# Altium PCB PDB_Rev1.PcbDoc (part 1 of 2)
Units mil, origin at the board's own origin, x right, y up, seen from the top; angles counter-clockwise.
Board outline 7157 x 4373 mil, 4 copper layers (Top Layer, Int1 (GND), Int2 (PWR), Bottom Layer), stack 53.912 mil thick; 59 components, 21 nets, 135 pads, 0 vias.
Unrouted connection lines stored in the file: 51.
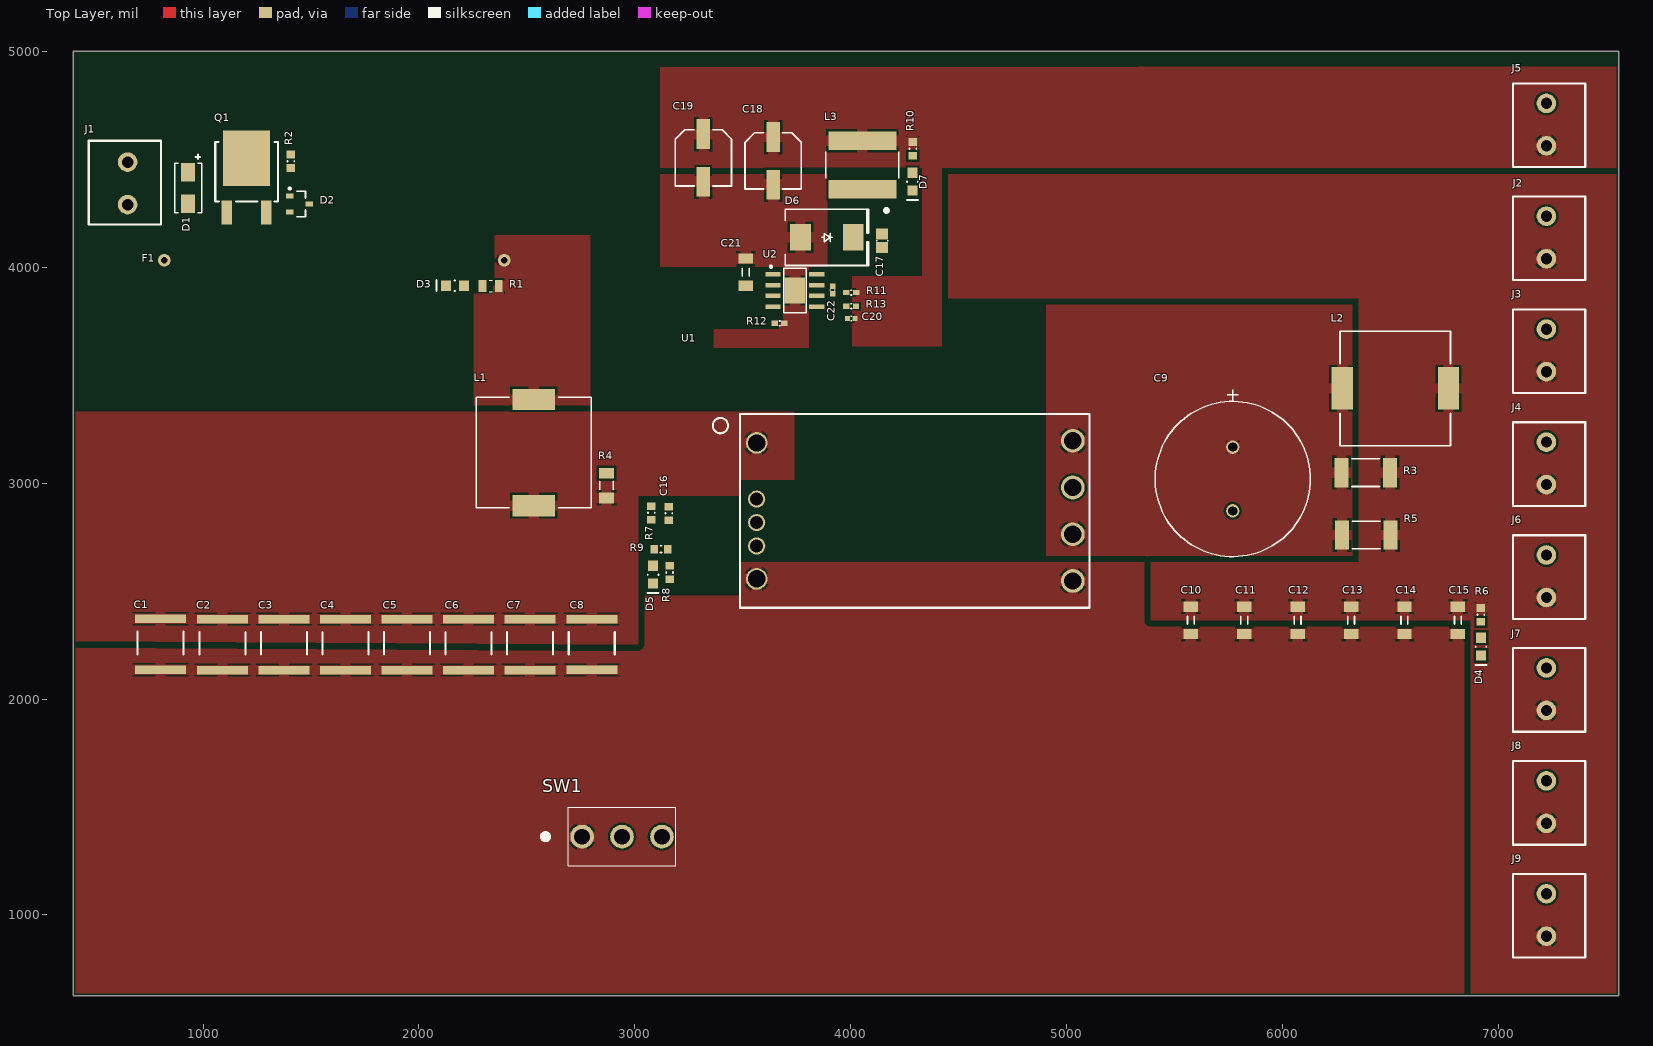
[diagram p0: Top Layer view]
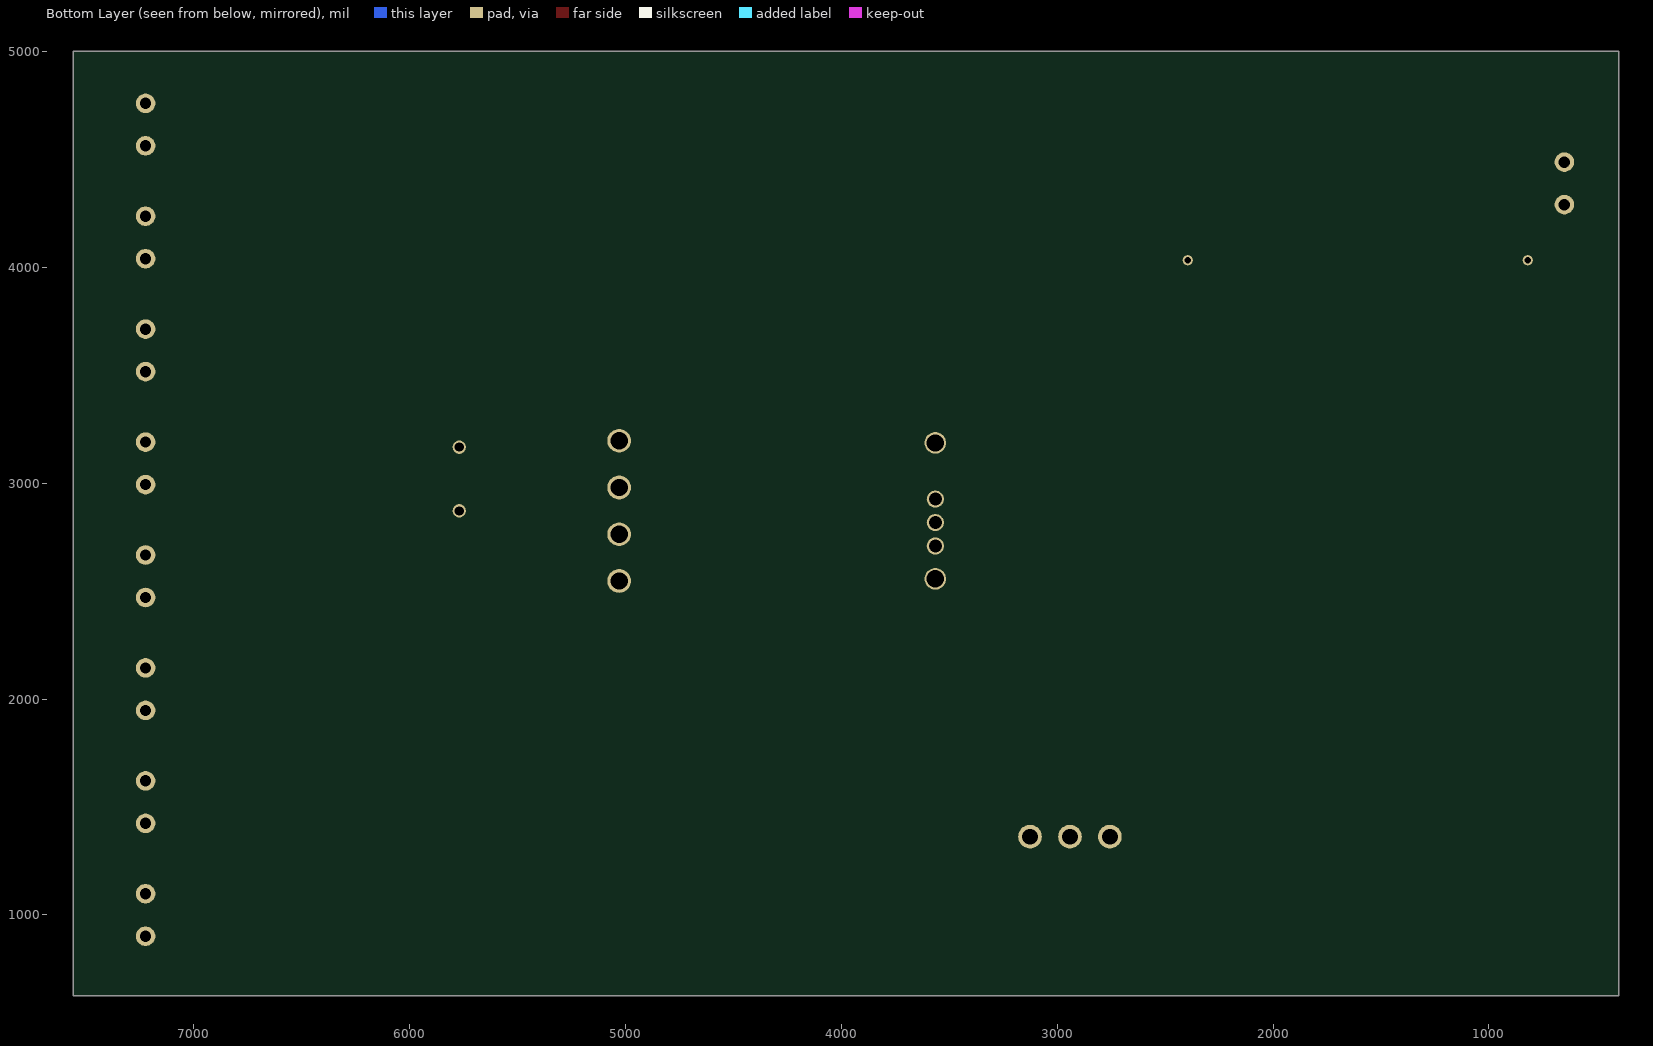
[diagram p1: Bottom Layer view, seen from below]
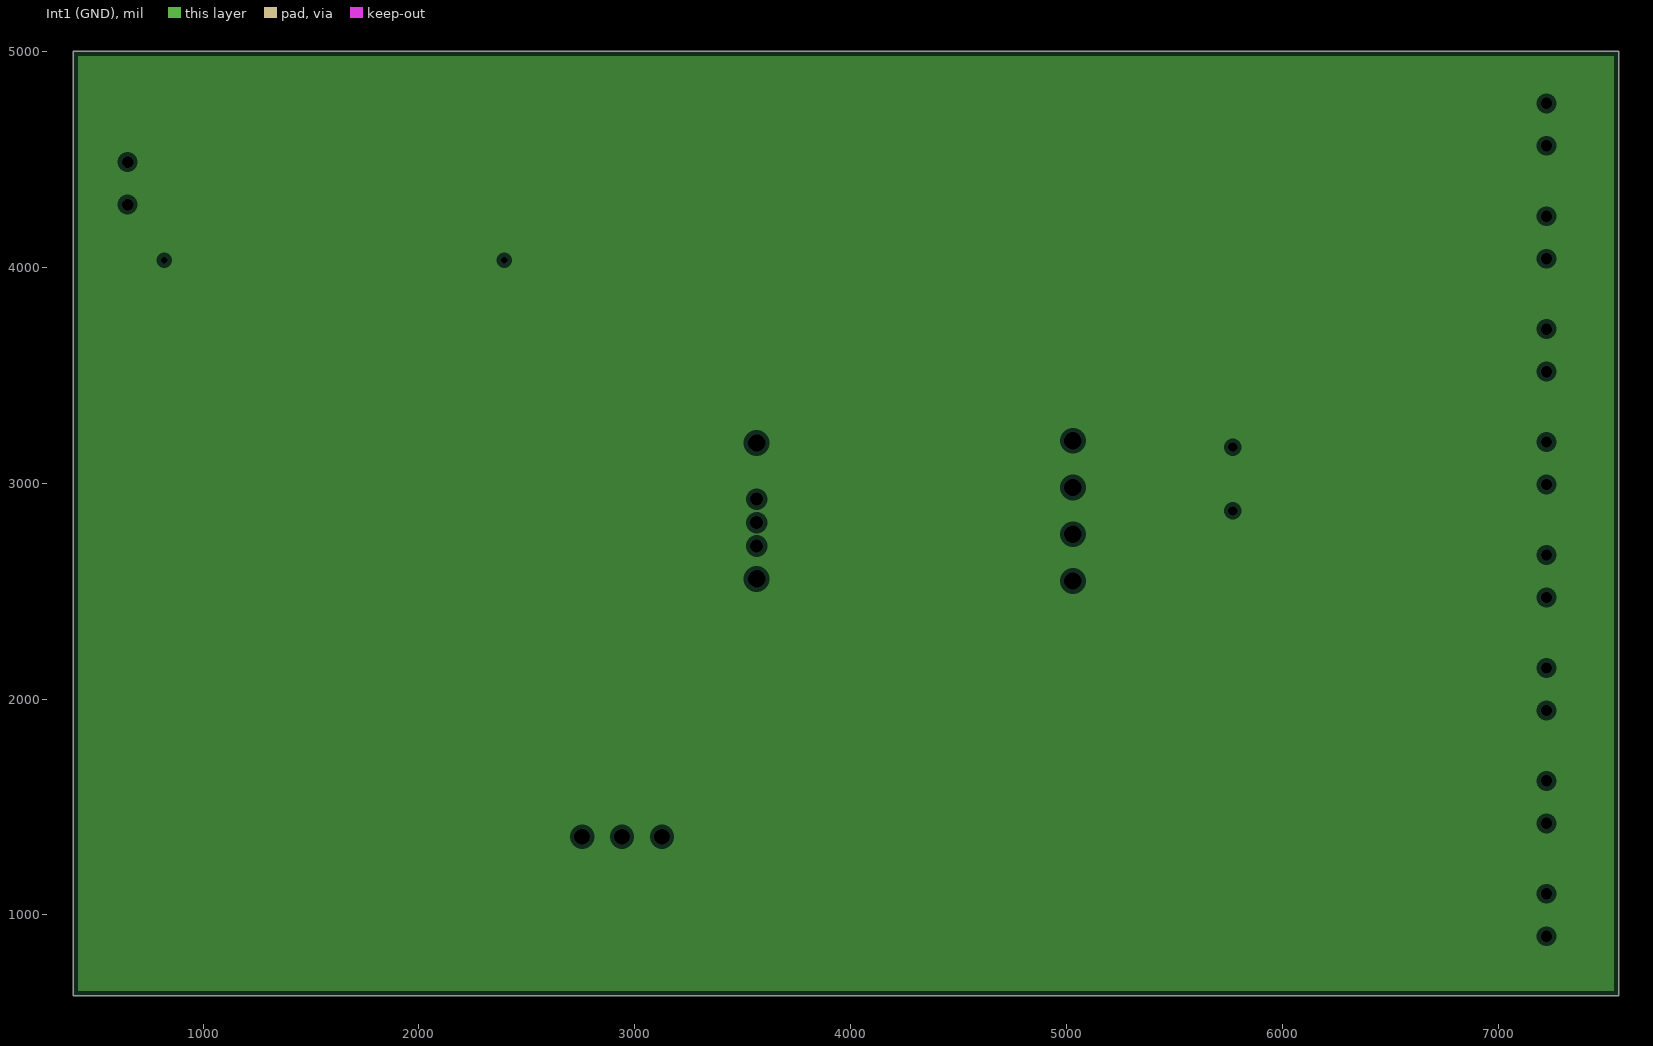
[diagram p2: Int1 (GND), clearances drawn from the general rule]
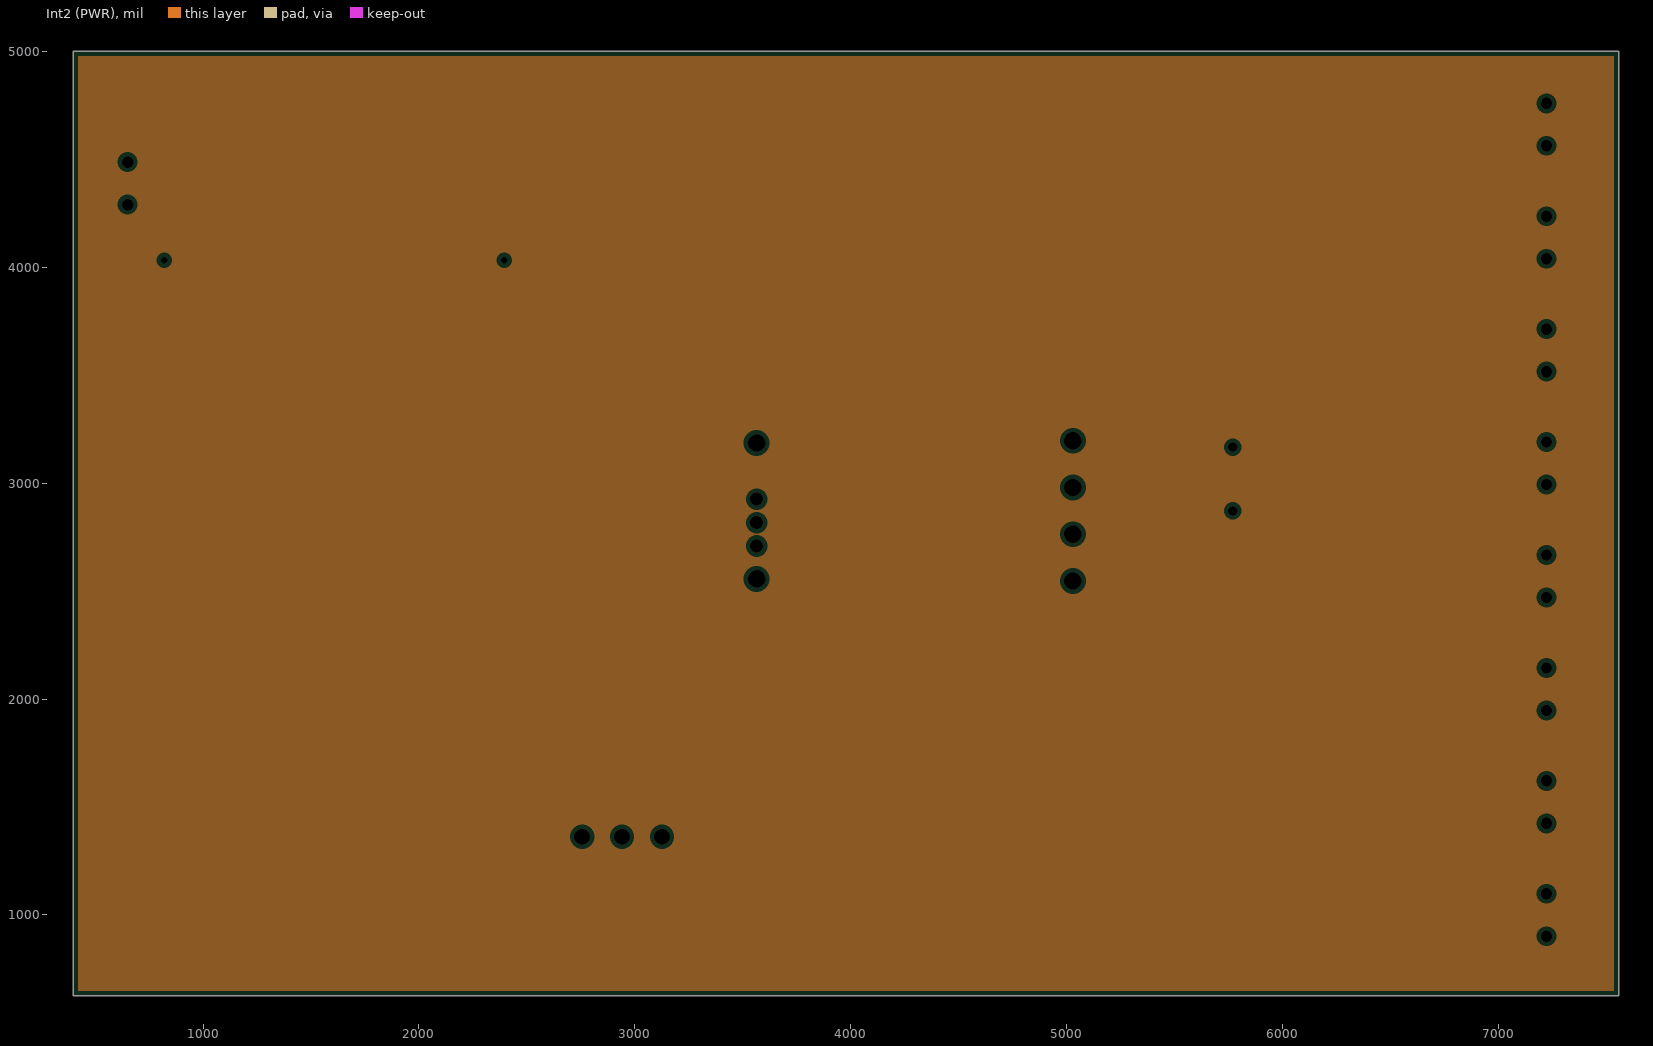
[diagram p3: Int2 (PWR), clearances drawn from the general rule]

## Layer stack, top to bottom
Top Solder: solder mask 1, SM-001, Dk 4
Top Layer: signal copper 1.378
Dielectric 1: prepreg 5.1, PP-017, Dk 4.3
Dielectric 2: prepreg 5.1, PP-017, Dk 4.3
Int1 (GND): plane copper 1.378
Dielectric 3: core 28, Core-039, Dk 4.8
Int2 (PWR): plane copper 1.378
Dielectric 4: prepreg 5.1, PP-017, Dk 4.3
Dielectric 5: prepreg 5.1, PP-017, Dk 4.3
Bottom Layer: signal copper 1.378
Bottom Solder: solder mask 1, SM-001, Dk 4

## Board outline
400,627 7557,627 7557,5000 400,5000

## Design rules (kind name [scope] priority, off if disabled: settings)
BoardOutlineClearance [All] p1: gap=10 ignorepadtopadclearanceinfootprint=FALSE except(0: Arc-SplitContinuation Track-SplitContinuation SMDPad-SplitContinuation THPad-SplitContinuation Via-SplitContinuation Fill-SplitContinuation Poly-SplitContinuation Region-SplitContinuation Text-SplitContinuation)
Clearance [All] p1: gap=10 ignorepadtopadclearanceinfootprint=FALSE except(0: Arc-Hole Track-Hole SMDPad-Hole THPad-Hole Via-Hole Fill-Hole Poly-Hole Region-Hole Text-Hole; 30: Poly-Poly)
PlaneClearance [All] p1: clearance=20
PlaneConnect [All] p1: planeconnectstyle=Relief reliefexpansion=20 reliefentries=4 reliefconductorwidth=10 reliefairgap=10
PolygonConnect "Thicc Polygon Connect" [InNetClass('Power Nets')] p1: connectstyle=Relief reliefconductorwidth=50 reliefentries=4 polygonreliefangle="90 Angle" airgapwidth=10
PolygonConnect [All] p2: connectstyle=Relief reliefconductorwidth=10 reliefentries=4 polygonreliefangle="90 Angle" airgapwidth=10
RoutingVias [All] p1: holewidth=28 width=50 viastyle="Through Hole" minholewidth=28 minwidth=50 maxholewidth=28 maxwidth=50
SolderMaskExpansion [All] p1: expansion=4
Width [All] p1: maxlimit=10 minlimit=10 preferedwidth=10
28 further rules are at their usual default settings.

## Classes and differential pairs
net class "Power Nets": +5V +17V +IN +OUT GND VBAT VBAT_FUSED
component class "3 - 19V Buck": C17 C18 C19 C20 C21 C22 D6 D7 L3 R10 R11 R12 R13 U2
component class "2 - 5V Buck": C1 C2 C3 C4 C5 C6 C7 C8 C9 C10 C11 C12 C13 C14 C15 C16 D2 D3 D4 D5 F1 L1 L2 Q1 R1 R2 R3 R4 R5 R6 R7 R8 R9 SW1 U1
component class "1 - Connectors": D1 J1 J2 J3 J4 J5 J6 J7 J8 J9

## Components (designator, comment, footprint, x,y, rotation, side; value= is the part's Value field where it differs from the comment)
C1 "4.7uF" CAPC5750X7R2A 803,2254 r90 top
C2 "4.7uF" CAPC5750X7R2A 1090,2252.89 r90 top
C3 "4.7uF" CAPC5750X7R2A 1375,2252.89 r90 top
C4 "4.7uF" CAPC5750X7R2A 1660,2252.89 r90 top
C5 "4.7uF" CAPC5750X7R2A 1945,2252.89 r90 top
C6 "4.7uF" CAPC5750X7R2A 2230,2252.89 r90 top
C7 "4.7uF" CAPC5750X7R2A 2515,2252.89 r90 top
C8 "4.7uF" CAPC5750X7R2A 2801,2253 r90 top
C9 "URS1A103MHD1TN" CAP_UBY_18X25_NC 5770,3167.28 r270 top
C10 "10uF" CAPC1206(3216) 5576,2365 r90 top
C11 "10uF" CAPC1206(3216) 5823.4,2365 r90 top
C12 "12061Z475KAT2A" CAPC1206(3216) 6070.8,2365 r90 top
C13 "12061Z475KAT2A" CAPC1206(3216) 6318.2,2365 r90 top
C14 "12061Z475KAT2A" CAPC1206(3216) 6565.6,2365 r90 top
C15 "12061Z475KAT2A" CAPC1206(3216) 6813,2365 r90 top
C16 "CAP_0.1uF_50V_0603" CAPC0603(1608)55_N 3158,2860 r90 top value=0.1uF
C17 "GRM21BR71H224MA01L" "CAP 0805_2012" 4146,4124 r270 top
C18 "25SVPF47M" 25SVPF47M 3641,4493.24 r270 top
C19 "25SVPF47M" 25SVPF47M 3318,4507 r270 top
C20 "GRM155R71H471KA01D" "CAP 0402_1005" 4002.32,3763 r0 top
C21 "GRM31CR71H475KA12L" CAPC1206(3216) 3514,3978 r90 top value=4.7µF
C22 "GRM155R71C822KA01D" "CAP 0402_1005" 3917,3895 r270 top
D1 "SMAJ20A-TR" DO-214AC_UNI 931,4367 r270 top
D2 "DIO_ZENER_27V" SOT23-3 1447,4294 r0 top
D3 "DIO_LED_G" LED_0805_LINE 2167,3915 r180 top
D4 "DIO_LED_G" LED_0805_LINE 6920,2243 r270 top
D5 "DIO_LED_R" LED_0805_LINE 3085,2576.34 r270 top
D6 "B540C-13-F" "DO214AB SMC" 3890,4139 r0 top
D7 "DIO_LED_G" LED_0805_LINE 4286,4397 r270 top
F1 "0324015.HXP" FUSE 1608,4033 r0 top
J1 "CON_2M_TERM" 1935161 651,4389 r270 top
J2 "CON_2M_TERM" 1935161 7223,4138.49 r90 top
J3 "CON_2M_TERM" 1935161 7223,3615.41 r90 top
J4 "CON_2M_TERM" 1935161 7223,3092.33 r90 top
J5 "CON_2M_TERM" 1935161 7223,4661.57 r90 top
J6 "CON_2M_TERM" 1935161 7223,2569.25 r90 top
J7 "CON_2M_TERM" 1935161 7223,2046.16 r90 top
J8 "CON_2M_TERM" 1935161 7223,1523.08 r90 top
J9 "CON_2M_TERM" 1935161 7223,1000 r90 top
L1 "744309033" "WE-HCM 1390" 2532,3142.06 r270 top
L2 "744309033" "WE-HCM 1390" 6523.06,3439 r0 top
L3 "SRN8040-2R2Y" IND_BOURNS_SRN80 4054,4474 r90 top
Q1 "FDD6637" D-PAK 1202,4380 r0 top
R1 "RES_4.7kΩ_0805" RESC2012X60N 2332,3914 r0 top value=4.7kO
R2 "RES_1kΩ_0603" RESC0603(1608)_N 1407,4523 r270 top value=1kO
R3 "WSL2512R2500FEA" RESC6432X89X76NL25T25 6386,3049 r0 top
R4 "RES_1Ω_1206" RESC1206(3216)_N 2869,2988.91 r270 top
R5 "WSL2512R2500FEA" RESC6432X89X76NL25T25 6388,2760 r0 top
R6 "RES_1K_0603" RESC0603(1608)_N 6920,2359.01 r90 top value=1K
R7 "RES_1kΩ_0603" RESC0603(1608)_N 3077,2831 r90 top value=1kO
R8 "RES_49.9kΩ_0603" RESC0603(1608)_N 3161,2618 r270 top value=49.9kO
R9 "RES_1kΩ_0603" RESC0603(1608)_N 3090,2695 r0 top value=1kO
R10 "RES_3.3kΩ_0603" RESC0603(1608)_N 4288,4517.72 r90 top value=3.3kO
R11 "ERJ-2RKF2213X" "RES 0402_1005" 4003,3883 r0 top
R12 "CRCW040213K7FKED" "RES 0402_1005" 3670.64,3741 r180 top
R13 "CRCW040210K2FKED" "RES 0402_1005" 4002,3820 r180 top
SW1 "SW_SPDT" 100SP1T1B4M2QE 2941,1363 r0 top
U1 "DCM3623T50T0680" DCM3623T50T0680 4297,2872 r0 top
U2 "LMR14050SDDAR" DDA8 3742,3893 r0 top

## Footprints (in the part's own frame and the unit in brackets; to place one, negate y for a bottom-side part, rotate by r counter-clockwise, add the part's x,y. Pads: shape width x height; smd on the part's side, far side on the other; paste and mask are expansions set on the pad)
25SVPF47M [mm] "Aluminum Electrolytic Capacitor, Body 6.60x6.60x6.10mm, IPC Low Density"
  rect 3.5x1.6 smd: 1(-2.8,0) 2(2.8,0)
  silkscreen extent -3.3,-3.3 3.3,3.3, body extent -3.65,-3.3 3.65,3.3, height 5.9
100SP1T1B4M2QE [mm]
  round 2.775 hole 1.85: 1(-4.7,0) 2(0,0) 3(4.7,0)
  silkscreen extent -9.3,-3.43 6.35,3.43, body extent -6.35,-3.43 6.35,3.43, height 29.63
1935161 [mm]
  round 2.3 hole 1.325: 1(-2.5,0) 2(2.5,0)
  silkscreen extent -5.01,-4.57 4.83,3.94, body extent -5.01,-5.06 5.39,3.94, height 11.41
"CAP 0402_1005" [mm] "Chip Capacitor, 2-Leads, Body 1.02x0.51mm, IPC Medium Density"
  rect 0.6x0.64 smd: 1(-0.44,0) 2(0.44,0)
  silkscreen extent -0.05,-0.26 0.05,0.26, body extent -0.5,-0.26 0.5,0.26, height 0.52
"CAP 0805_2012" [mm] "Chip Capacitor, 2-Leads, Body 2.00x1.20mm, IPC Medium Density"
  rect 1.3x1.4 smd: 1(-0.8,0) 2(0.8,0)
  silkscreen extent -0.05,-0.63 0.05,0.63, body extent -1,-0.64 1,0.64, height 1.26
CAP_UBY_18X25_NC [mil]
  round 62 hole 42 mask+0: 1(0,0) 2(295.28,0)
  silkscreen extent -267,-359 507,360, body extent -207,-354 502,354, height 1044
CAPC0603(1608)55_N [mm] "Chip Capacitor, Body 1.6x0.8mm, Height 0.55mm, IPC Medium Density"
  rect 0.9x1 smd: 1(-0.8,0) 2(0.8,0)
  silkscreen extent -0.05,-0.4 0.05,0.4, body extent -0.87,-0.48 0.88,0.47, height 0.55
CAPC1206(3216) [mm] "Chip Capacitor, Body 3.2x1.6mm, Height 0.55mm, IPC Medium Density"
  rect 1.2x1.7 smd: 1(-1.6,0) 2(1.6,0)
  silkscreen extent -0.45,-0.4 0.45,0.4, body extent -1.6,-0.85 1.6,0.85, height 1.75
CAPC5750X7R2A [mm]
  rect 1x6 smd: 1(-3,0) 2(3,0)
  silkscreen extent -1.19,-2.7 1.47,2.71, body extent -3,-2.7 3.1,12.19, height 5.32
D-PAK [mm] "TO-252AA"
  rect 5.55x6.5 smd: 1(0,3.2)
  rect 1.25x2.85 smd: 2(-2.325,-3.2) 3(2.325,-3.2)
  silkscreen extent -3.68,-1.91 3.68,5.08, body extent -3.27,-4.08 3.27,5.8, height 2.64
DCM3623T50T0680 [mm] "DC to DC Converter"
  round 2.53 hole 2.03: A(-18.6,8) E(-18.6,-8)
  round 2.79 hole 2.03: A'(18.6,8.25) B'(18.6,2.75) C'(18.6,-2.75) D'(18.6,-8.25)
  round 2.02 hole 1.52: B(-18.6,1.38) C(-18.6,-1.38) D(-18.6,-4.13)
  silkscreen extent -23.75,-11.4 20.57,11.4, body extent -27.46,-19.05 27.09,19.05, height 6.41
DDA8 [mil]
  rect 70x21 smd: 1(-101,75) 2(-101,25) 3(-101,-25) 4(-101,-75) 5(101,-75) 6(101,-25) 7(101,25) 8(101,75)
  rect 94.49x122.05 smd: 9(0,0)
  silkscreen extent -116,-103 52,115, body extent -122,-98 122,98, height 66
"DO214AB SMC" [mm] "Molded Diode, 2-Leads, Body 6.85x5.90mm, IPC Medium Density"
  rect 2.45x3.15 smd: 1(-3.1,0) 2(3.1,0)
  silkscreen extent -4.9,-3.3 4.9,3.3, body extent -3.97,-2.95 3.97,2.95, height 2.6
DO-214AC_UNI [mm]
  rect 2.18x1.63 smd: 1(-1.857,0) 2(1.857,0)
  silkscreen extent -3.94,-1.59 2.92,1.59, body extent -2.6,-1.3 2.6,1.3, height 2.38
FUSE [mm] "FUSE HOLDER RADIAL 250V 6.3A PCB"
  round 1.48 / inner round 1.524 / far side round 1.2 hole 0.81: 1(-20,0) 2(20,0)
IND_BOURNS_SRN80 [mil]
  rect 87x315 smd paste+0 mask+0: 1(-112.5,0) 2(112.5,0)
  silkscreen extent -218,-168 62,168, body extent -160,-156 160,156, height 156
LED_0805_LINE [mm] "SMD, 2-Leads, Body 2x1.25mm"
  rect 1.2x1.2 smd: 1(-1.05,0) 2(1.05,0)
  silkscreen extent -0.05,-0.63 2.16,0.64, body extent -1,-0.63 1,0.63, height 0.8
"RES 0402_1005" [mm] "Chip Resistor, 2-Leads, Body 1.0x0.5mm, IPC Medium Density"
  rect 0.75x0.6 smd: 1(-0.575,0) 2(0.575,0)
  silkscreen extent -0.05,-0.28 0.05,0.27, body extent -0.5,-0.25 0.5,0.25, height 0.35
RESC0603(1608)_N [mm] "Chip Resistor, Body 1.6x0.8mm, IPC Medium Density"
  rect 0.9x1 smd: 1(0,0) 2(1.6,0)
  silkscreen extent 0.75,-0.4 0.85,0.4, body extent -0.05,-0.47 1.65,0.47, height 0.6
RESC1206(3216)_N [mm] "Chip Resistor, Body 3.2x1.6mm, IPC Medium Density"
  rect 1.25x1.8 smd: 1(-1.45,0) 2(1.45,0)
  silkscreen extent -0.5,-0.8 0.5,0.8, body extent -1.67,-0.87 1.67,0.87, height 0.75
RESC2012X60N [mm]
  rect 0.92x1.38 smd: 1(-0.955,0) 2(0.955,0)
  silkscreen extent -0.17,-0.68 0.17,0.68, body extent -1,-0.62 1,0.62, height 0.6
RESC6432X89X76NL25T25 [mm] "Chip Resistor, 2-Leads, Body 6.6x3.43mm, IPC Medium Density"
  rect 1.65x3.45 smd: 1(-2.85,0) 2(2.85,0)
  silkscreen extent -1.65,-1.63 1.65,1.63, body extent -3.3,-1.72 3.3,1.72, height 0.89
SOT23-3 [mm] "SOT23, 3-Leads, Body 2.90x2.30mm, Pitch 0.95mm, IPC Medium Density"
  rect 0.9x0.6 smd: 1(-1.15,0.95) 2(-1.15,-0.95) 3(1.15,0)
  silkscreen extent -1.27,-1.5 0.7,1.92, body extent -1.3,-1.5 1.3,1.5, height 1.1
"WE-HCM 1390" [mm] "SMD Inductor, 2-Leads, Body 12,50x13,00mm"
  rect 2.5x5 smd: 1(-6.25,0) 2(6.25,0)
  silkscreen extent -6.5,-6.75 6.5,6.75, body extent -7,-6.5 7,6.5, height 8.95

## Part data
C1 C2 C3 C4 C5 C6 C7 C8: library part CAP_4.7uF_100V_2220, "CAP CER 4.7UF 100V X7R 2220", Case/Package=2220, Case Code (Metric)=5750, Dielectric=X7R, Manufacturer=TDK, Manufacturer Part Number=C5750X7R2A475M230KA, Max Operating Temperature=125°C, Min Operating Temperature=-55°C, Package Quantity=1, Supplier Part Number 1=445-1450-1-ND, Tolerance=20%, Voltage=100V, Capacitance=4.7uF, Capacitor Value=4.7uF, Case Code (Imperial)=2220, Category="Ceramic Capacitors", ComponentLink1Description=https://datasheet.ciiva.com/24216/c5750x7r2a475m230ka-265798-24216581.pdf?src-supplier=Mouser, ComponentLink1URL=https://datasheet.ciiva.com/24216/c5750x7r2a475m230ka-265798-24216581.pdf?src-supplier=Mouser, ComponentLink2Description=https://datasheet.ciiva.com/16427/e413-c-16427893.pdf?src-supplier=Future+Electronics, ComponentLink2URL=https://datasheet.ciiva.com/16427/e413-c-16427893.pdf?src-supplier=Future+Electronics, ComponentLink3Description=https://datasheet.ciiva.com/28563/1484596-28563354.pdf?src-supplier=Element14, ComponentLink3URL=https://datasheet.ciiva.com/28563/1484596-28563354.pdf?src-supplier=Element14, ComponentLink4Description=https://datasheet.ciiva.com/22648/1642577-22648731.pdf?src-supplier=Element14, ComponentLink4URL=https://datasheet.ciiva.com/22648/1642577-22648731.pdf?src-supplier=Element14, Composition=Ceramic, Depth=5mm, Height=2.3mm, Lead Free="Lead Free", Length=5.7mm, Mount="Surface Mount", Number of Pins=2, Packaging="Tape and Reel", Pricing 1="1=2.58000, 10=2.08700, 100=1.59390 (USD)", REACH SVHC="No SVHC", RoHS=Yes, Stock 1=45989, Supplier 1=Digi-Key, Termination=SMD/SMT, Thickness=0.098inch, Voltage Rating=100V, Voltage Rating (DC)=100V, Weight=0.016932oz, Width=0.197inch
C9: "CAP ALUM 10000UF 20% 10V RADIAL", Capacitance=10000uF, Case/Package=Radial, Manufacturer 1=Nichicon, Max Operating Temperature=85°C, Min Operating Temperature=-40°C, Package Quantity=250, Ripple Current=2.35A, Supplier Part Number 1=493-12364-1-ND, Tolerance=20%, Voltage Rating=10V, ComponentLink1Description=https://datasheet.ciiva.com/29548/e-rs-29548199.pdf?src-supplier=Digi-Key, ComponentLink1URL=https://datasheet.ciiva.com/29548/e-rs-29548199.pdf?src-supplier=Digi-Key, ComponentLink2Description=https://datasheet.ciiva.com/29548/e-rs-29548200.pdf?src-supplier=Digi-Key, ComponentLink2URL=https://datasheet.ciiva.com/29548/e-rs-29548200.pdf?src-supplier=Digi-Key, Height - Seated (Max)=1.043inch, Lead Pitch=0.295inch, Life (Hours)=2000Hour, Manufacturer Part Number 1=URS1A103MHD1TN, Mount="Through Hole", Packaging="Tape and Reel", Pricing 1="1=2.34000, 10=1.89600, 100=1.44770 (USD)", RoHS=Yes, Stock 1=703, Supplier 1=Digi-Key
C10 C11: library part CAP_10uF_50V_1206, "CAP CER 10UF 50V X5R 1206", Manufacturer 1=Murata, Manufacturer Part Numer 1=GRT31CR61H106KE01L, Package="1206 (3216 Metric)", Supplier Part Number 1=490-12456-1-ND, Voltage Rating=50V, Dimensions="0.126\" L x 0.063\" W (3.20mm x 1.6mm)", Mount="Surface Mount", Supplier 1=Digi-Key
C12 C13 C14 C15: "Chip Capacitor, 4.7 uF, +/- 10%, 100 V, -55 to 125 degC, 1206 (3216 Metric), RoHS, Tape and Reel", Capacitance=4.7µF, Capacitance Tolerance=±10%, Ceramic Capacitor Case=1206[3216Metric], Dielectric Characteristic=X7S, Manufacturer=AVX, Operating Temperature Max=125degC, Operating Temperature Min=-55degC, Voltage Rating=100V, Datasheet URL=https://datasheet.ciiva.com/22677/1789384-22677168.pdf, Datasheet Version=Oct-13, Manufacturer URL=http://www.avx.com/, MSL=MSL1-Unlimited, Packaging=CutTape, SVHC=NoSVHC(17-Dec-2015)
C16: "CAP CER 0.1UF 50V X7R 0603", Manufacturer 1=Yageo, Manufacturer Part Number 1=CC0603KRX7R9BB104, Package="0603 (1608 Metric)", Supplier Part Number 1=311-1344-1-ND, Temperature Coefficient=X7R, Voltage Rating=50V, Dimensions="0.063\" L x 0.031\" W (1.60mm x 0.80mm)", Mount="Surface Mount", Supplier 1=Digi-Key
C17: "CAP CER 0.22UF 50V X7R 0805", Capacitance=0.22µF, Case/Package=0805, Case Code (Metric)=2012, Dielectric=X7R, Manufacturer 1=Murata, Max Operating Temperature=125°C, Min Operating Temperature=-55°C, Package Quantity=1, Supplier Part Number 1=490-1671-1-ND, Tolerance=20%, Voltage Rating=50V, Case Code (Imperial)=0805, ComponentLink1Description=https://datasheet.ciiva.com/5421/product-5421097.pdf?src-supplier=Mouser, ComponentLink1URL=https://datasheet.ciiva.com/5421/product-5421097.pdf?src-supplier=Mouser, ComponentLink2Description=https://datasheet.ciiva.com/136/partnumbering-e-01-136536.pdf?src-supplier=Digi-Key, ComponentLink2URL=https://datasheet.ciiva.com/136/partnumbering-e-01-136536.pdf?src-supplier=Digi-Key, ComponentLink3Description=https://datasheet.ciiva.com/136/partnumbering-e-01-136537.pdf?src-supplier=Digi-Key, ComponentLink3URL=https://datasheet.ciiva.com/136/partnumbering-e-01-136537.pdf?src-supplier=Digi-Key, ComponentLink4Description=https://datasheet.ciiva.com/136/partnumbering-e-01-136538.pdf?src-supplier=Digi-Key, ComponentLink4URL=https://datasheet.ciiva.com/136/partnumbering-e-01-136538.pdf?src-supplier=Digi-Key, Depth=1.25mm, Height=1.25mm, Lead Free="Lead Free", Length=2mm, Manufacturer Part Number 1=GRM21BR71H224MA01L, Mount="Surface Mount", Packaging="Tape and Reel", Pricing 1="1=0.33000, 10=0.23100, 100=0.13850, 500=0.10388, 1000=0.08772 (USD)", Radiation Hardening=No, RoHS=Yes, Stock 1=7809, Supplier 1=Digi-Key, Termination=SMD/SMT, Thickness=0.053inch, Voltage Rating (DC)=50V, Width=0.049inch
C18 C19: "CAP ALUM POLY 47UF 20% 25V SMD", Breakdown Voltage=24.4V, Capacitance=47µF, Case/Package=Radial, Clamping Voltage=35.5V, Current=113A, ESR (Equivalent Series Resistance)=30mR, Leakage Current=235uA, Manufacturer 1=Panasonic, Manufacturer 2="Vishay Semiconductors", Manufacturer Part Number 2=SMAJ22A-E3/61, Max Breakdown Voltage=26.9V, Max Forward Surge Current (Ifsm)=40A, Max Operating Temperature=105°C, Max Power Dissipation=400W, Max Reverse Leakage Current=1uA, Max Surge Current=11.3A, Min Operating Temperature=-55°C, Operating Supply Voltage=22V, Package Quantity=1, Ripple Current=2.8A, Supplier Part Number 1=P16513CT-ND, Test Current=1mA, Tolerance=20%, Voltage=25V, Working Voltage=3.5V, ComponentLink1Description=https://datasheet.ciiva.com/22746/1734360-22746218.pdf?src-supplier=Element14, ComponentLink1URL=https://datasheet.ciiva.com/22746/1734360-22746218.pdf?src-supplier=Element14, ComponentLink2Description=https://datasheet.ciiva.com/24025/svpf-os-262415-24025725.pdf?src-supplier=Mouser, ComponentLink2URL=https://datasheet.ciiva.com/24025/svpf-os-262415-24025725.pdf?src-supplier=Mouser, ComponentLink3Description=https://datasheet.ciiva.com/48542/svpf-eng-ds-48542390.pdf?src-supplier=Distrelec, ComponentLink3URL=https://datasheet.ciiva.com/48542/svpf-eng-ds-48542390.pdf?src-supplier=Distrelec, ComponentLink4Description=https://datasheet.ciiva.com/25746/1734360-25746558.pdf?src-supplier=Farnell, ComponentLink4URL=https://datasheet.ciiva.com/25746/1734360-25746558.pdf?src-supplier=Farnell, ComponentLink5Description=https://datasheet.ciiva.com/18426/70217282-18426662.pdf?src-supplier=Allied+Electronics, ComponentLink5URL=https://datasheet.ciiva.com/18426/70217282-18426662.pdf?src-supplier=Allied+Electronics, ComponentLink6Description=https://datasheet.ciiva.com/4508/smaj50a-241759-4508681.pdf?src-supplier=Mouser, ComponentLink6URL=https://datasheet.ciiva.com/4508/smaj50a-241759-4508681.pdf?src-supplier=Mouser, Diameter=6.3mm, Direction=Unidirectional, Dissipation Factor=12%, Element Configuration=Single, Height=5.9mm, Height - Seated (Max)=0.236inch, Lead Free="Lead Free", Length=5.9mm, Life (Hours)=5000Hour, Manufacturer Part Number 1=25SVPF47M, Min Breakdown Voltage=24.4V, Mount="Surface Mount", Number of Channels=1, Number of Elements=1, Number of Pins=6, Packaging="Tape and Reel", Peak Pulse Current=11.3A, Peak Pulse Power=400W, Polarity=Polar, Power Dissipation=400W, Pricing 1="1=1.29000, 10=1.02200, 100=0.76620, 500=0.57888 (USD)", Pricing 2="1=0.41000, 10=0.30600, 25=0.27560, 100=0.14530, 250=0.14380, 500=0.12876 (USD)", Radiation Hardening=No, REACH SVHC="No SVHC", Reverse Breakdown Voltage=24.4V, Reverse Standoff Voltage=22V, Ripple Current (AC)=2.8A, RoHS=Yes, Stock 1=6381, Stock 2=885, Supplier 1=Digi-Key, Supplier 2=Digi-Key, Supplier Part Number 2=SMAJ22A-E3/61GICT-ND, Termination=SMD/SMT, Voltage Rating=25V, Voltage Rating (DC)=25V, Width=0.11inch
C20: "CAP CER 470PF 50V X7R 0402", Capacitance=470pF, Case/Package=0402, Case Code (Metric)=1005, Dielectric=X7R, Manufacturer 1=Murata, Max Operating Temperature=125°C, Min Operating Temperature=-55°C, Package Quantity=1, Supplier Part Number 1=490-1300-1-ND, Tolerance=10%, Voltage=50V, Case Code (Imperial)=0402, ComponentLink1Description=https://datasheet.ciiva.com/11786/0900766b80ef921d-11786912.pdf?src-supplier=RSComponents, ComponentLink1URL=https://datasheet.ciiva.com/11786/0900766b80ef921d-11786912.pdf?src-supplier=RSComponents, ComponentLink2Description=https://datasheet.ciiva.com/18101/getdatasheetpartid-37722-18101030.pdf?src-supplier=Verical, ComponentLink2URL=https://datasheet.ciiva.com/18101/getdatasheetpartid-37722-18101030.pdf?src-supplier=Verical, ComponentLink3Description=https://datasheet.ciiva.com/19476/1856505-19476137.pdf?src-supplier=Jameco, ComponentLink3URL=https://datasheet.ciiva.com/19476/1856505-19476137.pdf?src-supplier=Jameco, ComponentLink4Description=https://datasheet.ciiva.com/29199/454340-da-01-en-vs-kondensator-0402-29199656.pdf?src-supplier=Conrad, ComponentLink4URL=https://datasheet.ciiva.com/29199/454340-da-01-en-vs-kondensator-0402-29199656.pdf?src-supplier=Conrad, ComponentLink5Description=https://datasheet.ciiva.com/129/partnumbering-e-01-129843.pdf?src-supplier=Digi-Key, ComponentLink5URL=https://datasheet.ciiva.com/129/partnumbering-e-01-129843.pdf?src-supplier=Digi-Key, ComponentLink6Description=https://datasheet.ciiva.com/129/partnumbering-e-01-129844.pdf?src-supplier=Digi-Key, ComponentLink6URL=https://datasheet.ciiva.com/129/partnumbering-e-01-129844.pdf?src-supplier=Digi-Key, ComponentLink7Description=https://datasheet.ciiva.com/129/partnumbering-e-01-129845.pdf?src-supplier=Digi-Key, ComponentLink7URL=https://datasheet.ciiva.com/129/partnumbering-e-01-129845.pdf?src-supplier=Digi-Key, ComponentLink8Description=https://datasheet.ciiva.com/14116/grmseries-highdielectrictype-eng-14116837.pdf?src-supplier=Distrelec, ComponentLink8URL=https://datasheet.ciiva.com/14116/grmseries-highdielectrictype-eng-14116837.pdf?src-supplier=Distrelec, ComponentLink9Description=https://datasheet.ciiva.com/22698/608985-22698425.pdf?src-supplier=Element14, ComponentLink9URL=https://datasheet.ciiva.com/22698/608985-22698425.pdf?src-supplier=Element14, ComponentLink10Description=https://datasheet.ciiva.com/16199/product-16199180.pdf?src-supplier=Future+Electronics, ComponentLink10URL=https://datasheet.ciiva.com/16199/product-16199180.pdf?src-supplier=Future+Electronics, ComponentLink11Description=https://datasheet.ciiva.com/7937/608985-7937630.pdf?src-supplier=Element14, ComponentLink11URL=https://datasheet.ciiva.com/7937/608985-7937630.pdf?src-supplier=Element14, Depth=0.5mm, Height=0.5mm, Lead Free="Lead Free", Length=1mm, Manufacturer Part Number 1=GRM155R71H471KA01D, Material=Ceramic, Mount="Surface Mount", Number of Pins=2, Packaging="Tape and Reel", Pricing 1="1=0.10000, 10=0.05400, 100=0.02420, 500=0.01728, 1000=0.01358, 2500=0.01235, 5000=0.01136 (USD)", Radiation Hardening=No, REACH SVHC="No SVHC", RoHS=Yes, Stock 1=1593174, Supplier 1=Digi-Key, Termination=SMD/SMT, Thickness=0.022inch, Voltage Rating=50V, Voltage Rating (DC)=50V, Width=0.02inch
C21: "CAP CER 4.7UF 50V X7R 1206", Capacitance=4.7µF, Case/Package=1206, Case Code (Metric)=3216, Dielectric=X7R, Manufacturer 1=Murata, Max Operating Temperature=125°C, Min Operating Temperature=-55°C, Package Quantity=2000, Supplier Part Number 1=490-6521-1-ND, Tolerance=10%, Voltage=50V, Case Code (Imperial)=1206, ComponentLink1Description=https://datasheet.ciiva.com/6072/415379-6072784.pdf?src-supplier=Farnell, ComponentLink1URL=https://datasheet.ciiva.com/6072/415379-6072784.pdf?src-supplier=Farnell, ComponentLink2Description=https://datasheet.ciiva.com/3777/2267grm31cr71h475ka1223-3777241.pdf?src-supplier=Arrow, ComponentLink2URL=https://datasheet.ciiva.com/3777/2267grm31cr71h475ka1223-3777241.pdf?src-supplier=Arrow, ComponentLink3Description=https://datasheet.ciiva.com/29202/450972-da-01-de-vs-chip-kond-1206-4-7-uf-10pr-50-0v-x7r-29202576.pdf?src-supplier=Conrad, ComponentLink3URL=https://datasheet.ciiva.com/29202/450972-da-01-de-vs-chip-kond-1206-4-7-uf-10pr-50-0v-x7r-29202576.pdf?src-supplier=Conrad, ComponentLink4Description=https://datasheet.ciiva.com/29202/451279-da-01-de-vs-kondens-grm31-cr71h-475ka12l-29202365.pdf?src-supplier=Conrad, ComponentLink4URL=https://datasheet.ciiva.com/29202/451279-da-01-de-vs-kondens-grm31-cr71h-475ka12l-29202365.pdf?src-supplier=Conrad, ComponentLink5Description=https://datasheet.ciiva.com/7937/415310-7937749.pdf?src-supplier=Element14, ComponentLink5URL=https://datasheet.ciiva.com/7937/415310-7937749.pdf?src-supplier=Element14, ComponentLink6Description=https://datasheet.ciiva.com/6270/partnumbering-e-01-6270217.pdf?src-supplier=Digi-Key, ComponentLink6URL=https://datasheet.ciiva.com/6270/partnumbering-e-01-6270217.pdf?src-supplier=Digi-Key, ComponentLink7Description=https://datasheet.ciiva.com/6270/partnumbering-e-01-6270218.pdf?src-supplier=Digi-Key, ComponentLink7URL=https://datasheet.ciiva.com/6270/partnumbering-e-01-6270218.pdf?src-supplier=Digi-Key, ComponentLink8Description=https://datasheet.ciiva.com/6270/partnumbering-e-01-6270219.pdf?src-supplier=Digi-Key, ComponentLink8URL=https://datasheet.ciiva.com/6270/partnumbering-e-01-6270219.pdf?src-supplier=Digi-Key, Depth=1.6mm, Height=1.6mm, Lead Free="Lead Free", Length=3.2mm, Manufacturer Part Number 1=GRM31CR71H475KA12L, Material=Ceramic, Mount="Surface Mount", Packaging="Tape and Reel", Pricing 1="1=0.86000, 10=0.63700, 100=0.43660, 500=0.34562, 1000=0.29105 (USD)", Radiation Hardening=No, REACH SVHC="No SVHC", RoHS=Yes, Stock 1=12089, Supplier 1=Digi-Key, Termination=SMD/SMT, Thickness=0.071inch, Voltage Rating=50V, Voltage Rating (DC)=50V, Width=0.063inch
C22: "CAP CER 8200PF 16V X7R 0402", Capacitance="8200 pF", Case/Package=0402, Case Code (Metric)=1005, Dielectric=X7R, Manufacturer 1=Murata, Max Operating Temperature=125°C, Min Operating Temperature=-55°C, Package Quantity=1, Supplier Part Number 1=490-6338-1-ND, Tolerance=10%, Voltage Rating=16V, Case Code (Imperial)=0402, ComponentLink1Description=https://datasheet.ciiva.com/11619/product-11619716.pdf?src-supplier=Avnet, ComponentLink1URL=https://datasheet.ciiva.com/11619/product-11619716.pdf?src-supplier=Avnet, ComponentLink2Description=https://datasheet.ciiva.com/18184/getdatasheetpartid-163702-18184683.pdf?src-supplier=Verical, ComponentLink2URL=https://datasheet.ciiva.com/18184/getdatasheetpartid-163702-18184683.pdf?src-supplier=Verical, ComponentLink3Description=https://datasheet.ciiva.com/6263/partnumbering-e-01-6263702.pdf?src-supplier=Digi-Key, ComponentLink3URL=https://datasheet.ciiva.com/6263/partnumbering-e-01-6263702.pdf?src-supplier=Digi-Key, ComponentLink4Description=https://datasheet.ciiva.com/6263/partnumbering-e-01-6263704.pdf?src-supplier=Digi-Key, ComponentLink4URL=https://datasheet.ciiva.com/6263/partnumbering-e-01-6263704.pdf?src-supplier=Digi-Key, ComponentLink5Description=https://datasheet.ciiva.com/6263/partnumbering-e-01-6263706.pdf?src-supplier=Digi-Key, ComponentLink5URL=https://datasheet.ciiva.com/6263/partnumbering-e-01-6263706.pdf?src-supplier=Digi-Key, Depth=0.5mm, Height=0.5mm, Lead Free="Lead Free", Length=1mm, Manufacturer Part Number 1=GRM155R71C822KA01D, Mount="Surface Mount", Packaging="Tape and Reel", Pricing 1="1=0.10000, 10=0.04500, 100=0.01980, 500=0.01416, 1000=0.01113, 2500=0.01012, 5000=0.00931 (USD)", Radiation Hardening=No, RoHS=Yes, Stock 1=72521, Supplier 1=Digi-Key, Termination=SMD/SMT, Thickness=0.022inch, Voltage Rating (DC)=16V, Width=0.02inch
D1: "TVS DIODE, 400W, 20V, DO-214AC (SMA)", Breakdown Voltage=22.2V, Case/Package=SMA, Clamping Voltage=42.8V, Leakage Current=200nA, Manufacturer 1=STMicroelectronics, Max Breakdown Voltage=23.4V, Max Operating Temperature=150°C, Max Power Dissipation=400W, Min Operating Temperature=-55°C, Package Quantity=5000, Peak Pulse Current=54A, Power Line Protection=No, Reverse Standoff Voltage=20V, Supplier Part Number 1=497-16189-1-ND, Test Current=1mA, Category="TVS Diodes", ComponentLink1Description=https://datasheet.ciiva.com:443/pdfs/VipMasterIC/IC/SGST/SGSTS27501/SGSTS27501-1.pdf?src-supplier=IHS+Markit, ComponentLink1URL=https://datasheet.ciiva.com:443/pdfs/VipMasterIC/IC/SGST/SGSTS27501/SGSTS27501-1.pdf?src-supplier=IHS+Markit, ComponentLink2Description=https://datasheet.ciiva.com/15063/cd00001333-15063686.pdf?src-supplier=Digi-Key, ComponentLink2URL=https://datasheet.ciiva.com/15063/cd00001333-15063686.pdf?src-supplier=Digi-Key, Composition=Zener, Direction=Unidirectional, Element Configuration=Single, Lead Free="Lead Free", Manufacturer Part Number 1=SMAJ20A-TR, Max Reverse Leakage Current=200nA, Min Breakdown Voltage=22.2V, Mount="Surface Mount", Number of Elements=1, Number of Pins=2, Number of Unidirectional Channels=1, Packaging="Tape and Reel", Peak Pulse Power=400W, Polarity=Unidirectional, Power Dissipation=400W, Pricing 1="1=0.36000, 10=0.29500, 25=0.26960, 100=0.16930, 250=0.16740, 500=0.15676, 1000=0.10659, 2500=0.10220 (USD)", Reverse Breakdown Voltage=22.2V, RoHS=Yes, Stock 1=8295, Supplier 1=Digi-Key
D2: "DIODE ZENER 27V 250MW SOT23", Forward Voltage=0.9V, Manufacturer 1="Nexperia USA Inc.", Manufacturer Part Number 1=BZX84-C27,215, Package/Case=SOT-23-3, Supplier Part Number 1=1727-5026-2-ND, Tolerance=5%, Working Voltage=27V, Mount="Surface Mount", Supplier 1=Digi-Key
D3 D4 D7: "LED GREEN DIFFUSED 0805 SMD", Forward Voltage Drop=2.2V, Manufacturer 1=OSRAM, Manufacturer Part Number 1="LG R971-KN-1", Package="0805 (2012 Metric)", Supplier Part Number 1=475-1410-1-ND, Mount="Surface Mount", Supplier 1=Digi-Key
D5: "LED RED DIFFUSED 0805 SMD", Forward Voltage Drop=2V, Manufacturer 1=OSRAM, Manufacturer Part Number 1="LS R976-NR-1", Package="0805 (2012 Metric)", Supplier Part Number 1=475-1278-1-ND, Mount="Surface Mount", Supplier 1=Digi-Key
D6: "Diode Schottky 40V 5A Surface Mount SMC", Average Rectified Current=5A, Capacitance=300pF, Case/Package=SMC, Forward Voltage=550mV, Manufacturer 1=Diodes, Max Forward Surge Current (Ifsm)=100A, Max Operating Temperature=125°C, Max Repetitive Reverse Voltage (Vrrm)=40V, Min Operating Temperature=-55°C, Package Quantity=3000, Peak Reverse Current=500uA, Supplier Part Number 1=B540C-FDIDKR-ND, ComponentLink1Description=https://datasheet.ciiva.com/914/ds13012-914960.pdf?src-supplier=Digi-Key, ComponentLink1URL=https://datasheet.ciiva.com/914/ds13012-914960.pdf?src-supplier=Digi-Key, ComponentLink2Description=https://datasheet.ciiva.com/26949/getdatasheetpartid-184980-26949363.pdf?src-supplier=Verical, ComponentLink2URL=https://datasheet.ciiva.com/26949/getdatasheetpartid-184980-26949363.pdf?src-supplier=Verical, ComponentLink3Description=https://datasheet.ciiva.com/26788/b540c-13-f-26788854.pdf?src-supplier=IIIC, ComponentLink3URL=https://datasheet.ciiva.com/26788/b540c-13-f-26788854.pdf?src-supplier=IIIC, ComponentLink4Description=https://datasheet.ciiva.com/1177/ds13012-1177530.pdf?src-supplier=Element14, ComponentLink4URL=https://datasheet.ciiva.com/1177/ds13012-1177530.pdf?src-supplier=Element14, ComponentLink5Description=https://datasheet.ciiva.com/914/ds13012-914958.pdf?src-supplier=Digi-Key, ComponentLink5URL=https://datasheet.ciiva.com/914/ds13012-914958.pdf?src-supplier=Digi-Key, ComponentLink6Description=https://datasheet.ciiva.com/914/ds13012-914959.pdf?src-supplier=Digi-Key, ComponentLink6URL=https://datasheet.ciiva.com/914/ds13012-914959.pdf?src-supplier=Digi-Key, ComponentLink7Description=https://datasheet.ciiva.com/8303/ds13012-8303112.pdf?src-supplier=Avnet, ComponentLink7URL=https://datasheet.ciiva.com/8303/ds13012-8303112.pdf?src-supplier=Avnet, ComponentLink8Description=https://datasheet.ciiva.com/25919/ds13012-25919706.pdf?src-supplier=Avnet+Europe, ComponentLink8URL=https://datasheet.ciiva.com/25919/ds13012-25919706.pdf?src-supplier=Avnet+Europe, ComponentLink9Description=https://datasheet.ciiva.com/16200/ds13012-16200443.pdf?src-supplier=Future+Electronics, ComponentLink9URL=https://datasheet.ciiva.com/16200/ds13012-16200443.pdf?src-supplier=Future+Electronics, Contact Plating=Tin,Matte, Current=5A, Current Rating=5A, Element Configuration=Single, Forward Current=5A, Height=2.5mm, Lead Free="Lead Free", Length=7.11mm, Manufacturer Part Number 1=B540C-13-F, Max Reverse Voltage (DC)=40V, Mount="Surface Mount", Number of Pins=2, Output Current=5A, Packaging="Tape and Reel", Peak Non-Repetitive Surge Current=100A, Polarity=Standard, Pricing 1="1=0.49000, 10=0.41700, 25=0.38880, 100=0.28890, 250=0.27440, 500=0.22554, 1000=0.18332 (USD)", Radiation Hardening=No, REACH SVHC="No SVHC", RoHS=Yes, Stock 1=27000, Supplier 1=Digi-Key, Termination=SMD/SMT, Voltage=40V, Voltage Rating (DC)=40V, Weight=0.007408oz, Width=6.22mm
F1: "FUSE CERM 15A 250VAC 125VDC 3AB", Case/Package=Axial, Current Rating=15A, DC Cold Resistance=5.05mR, Manufacturer 1=Littelfuse, Max Operating Temperature=125°C, Min Operating Temperature=-55°C, Package Quantity=100, Supplier Part Number 1=F1870-ND, Voltage Rating (AC)=250V, Voltage Rating (DC)=125V, Approvals=UL,CSA,CE,K-Mark, ComponentLink1Description=https://datasheet.ciiva.com/7880/314p-324p-7880741.pdf?src-supplier=Element14, ComponentLink1URL=https://datasheet.ciiva.com/7880/314p-324p-7880741.pdf?src-supplier=Element14, ComponentLink2Description=https://datasheet.ciiva.com/16369/314-324-16369693.pdf?src-supplier=Future+Electronics, ComponentLink2URL=https://datasheet.ciiva.com/16369/314-324-16369693.pdf?src-supplier=Future+Electronics, ComponentLink3Description=https://datasheet.ciiva.com/302/littelfuse-fuse-314-324-302287.pdf?src-supplier=Digi-Key, ComponentLink3URL=https://datasheet.ciiva.com/302/littelfuse-fuse-314-324-302287.pdf?src-supplier=Digi-Key, Diameter=6.985mm, Fuse Current=15A, Fuse Type="Cartridge, Ceramic", Housing Material=Ceramic, Lead Free="Lead Free", Length=1.288inch, Manufacturer Part Number 1=0324015.HXP, Mount="Through Hole", Packaging=Bulk, Pricing 1="1=1.74000, 5=1.65600, 10=1.57300, 50=1.26960, 100=1.07640, 250=1.04880, 500=0.88320, 1000=0.78660, 5000=0.69000 (USD)", REACH SVHC=Unknown, Resistance=5.05mR, RoHS=Yes, Stock 1=64, Supplier 1=Digi-Key, Termination=Axial, Working Voltage=250V
J1 J2 J3 J4 J5 J6 J7 J8 J9: "TERM BLK 2POS SIDE ENTRY 5MM", Color=Green, Current=18A, Current Rating=17.5A, Flammability Rating="UL94 V-0", Manufacturer 1="Phoenix Contact", Manufacturer Part Number 1=1935161, Max Current Rating=16A, Max Supply Voltage=250V, Package Quantity=250, Supplier Part Number 1=277-1667-ND, Voltage=300V, Voltage Rating (DC)=320V, Approvals=UL, ComponentLink1Description=https://datasheet.ciiva.com/15169/getdatasheetpartid-177903-15169663.pdf?src-supplier=Verical, ComponentLink1URL=https://datasheet.ciiva.com/15169/getdatasheetpartid-177903-15169663.pdf?src-supplier=Verical, ComponentLink2Description=https://datasheet.ciiva.com/16047/1935161-16047247.pdf?src-supplier=Onlinecomponents.com, ComponentLink2URL=https://datasheet.ciiva.com/16047/1935161-16047247.pdf?src-supplier=Onlinecomponents.com, ComponentLink3Description=https://datasheet.ciiva.com/824/combiconcompact5-0mmseries-824222.pdf?src-supplier=Digi-Key, ComponentLink3URL=https://datasheet.ciiva.com/824/combiconcompact5-0mmseries-824222.pdf?src-supplier=Digi-Key, Connector Type=Screw, Contact Material=Copper,Tin, Depth=9mm, Height=11.3mm, Housing Color=Green, Housing Material=Polyamide, Insulation Material=Nylon, Lead Free="Lead Free", Length=9mm, Material=Nylon, Mount="Through Hole", Number of Circuits=2, Number of Contacts=2, Number of Levels=1, Number of Pins=2, Number of Poles=2, Number of Positions=2, Number of Positions Per Level=2, Number of Rows=1, Orientation=Straight, Packaging=Bulk, Pitch=5mm, Pricing 1="1=0.43000, 10=0.41100, 50=0.39280, 100=0.38200, 250=0.35700, 500=0.32844, 1000=0.30350 (USD)", Radiation Hardening=No, REACH SVHC=Unknown, RoHS=Yes, Stock 1=15494, Supplier 1=Digi-Key, Termination=Solder, Voltage Rating=250V, Weight=0.067021oz, Width=14.9mm, Wire/Cable Gauge=26AWG, Wire Gauge (Max)=26AWG, Wire Gauge (Min)=12AWG
L1 L2: "Wurth Shielded Wire-wound SMD Inductor with a MnZn Core, 0.33 µH ±20% Flat Wire Winding 47.5A Idc", Case/Package=Nonstandard, Current Rating=47.5A, DC Resistance (DCR)=0.165mR, Inductance=330nH, Inductance Tolerance=20%, Manufacturer 1="Wurth Electronics", Max DC Current=50A, Max Operating Temperature=125°C, Min Operating Temperature=-40°C, Package Quantity=300, Saturation Current=62.5A, Self Resonant Frequency=158MHz, Test Frequency=100kHz, ComponentLink1Description=https://datasheet.ciiva.com/6697/744309033-6697424.pdf?src-supplier=Digi-Key, ComponentLink1URL=https://datasheet.ciiva.com/6697/744309033-6697424.pdf?src-supplier=Digi-Key, ComponentLink2Description=https://datasheet.ciiva.com/7764/1645981-7764994.pdf?src-supplier=Element14, ComponentLink2URL=https://datasheet.ciiva.com/7764/1645981-7764994.pdf?src-supplier=Element14, ComponentLink3Description=https://datasheet.ciiva.com/13320/744309033-25565-13320700.pdf?src-supplier=Mouser, ComponentLink3URL=https://datasheet.ciiva.com/13320/744309033-25565-13320700.pdf?src-supplier=Mouser, Composition=Wirewound, Core Material=Zinc, Height=9mm, Height - Seated (Max)=0.374inch, Lead Free="Lead Free", Length=0.551inch, Manufacturer Part Number 1=744309033, Mount="Surface Mount", Packaging="Tape and Reel", Pricing 1="1=2.22000, 10=2.17000, 25=2.10000, 50=2.02000, 100=1.95000 (USD)", REACH SVHC=Unknown, RMS Current (Irms)=50A, RoHS=Yes, Shielding=Shielded, Stock 1=186, Supplier 1=Newark, Termination=SMD/SMT, Tolerance=20%, Width=0.512inch
L3: "FIXED IND 2.2UH 6.3A 13 MOHM SMD", Case/Package=Nonstandard, Current Rating=6.3A, DC Resistance (DCR)=13mR, Inductance=2.2uH, Inductance Tolerance=30%, Manufacturer 1=Bourns, Max Operating Temperature=125°C, Min Operating Temperature=-40°C, Package Quantity=1000, Saturation Current=7.4A, Self Resonant Frequency=40MHz, Supplier Part Number 1=SRN8040-2R2YCT-ND, Test Frequency=100kHz, ComponentLink1Description=https://datasheet.ciiva.com/11802/0900766b80fe1f3f-11802605.pdf?src-supplier=RSComponents, ComponentLink1URL=https://datasheet.ciiva.com/11802/0900766b80fe1f3f-11802605.pdf?src-supplier=RSComponents, ComponentLink2Description=https://datasheet.ciiva.com/28678/srn8040-28678249.pdf?src-supplier=Element14, ComponentLink2URL=https://datasheet.ciiva.com/28678/srn8040-28678249.pdf?src-supplier=Element14, ComponentLink3Description=https://datasheet.ciiva.com/8515/srn8040-8515258.pdf?src-supplier=Avnet, ComponentLink3URL=https://datasheet.ciiva.com/8515/srn8040-8515258.pdf?src-supplier=Avnet, ComponentLink4Description=https://datasheet.ciiva.com/7847/1865628-7847915.pdf?src-supplier=Element14, ComponentLink4URL=https://datasheet.ciiva.com/7847/1865628-7847915.pdf?src-supplier=Element14, ComponentLink5Description=https://datasheet.ciiva.com/1049/srn8040-1049453.pdf?src-supplier=Digi-Key, ComponentLink5URL=https://datasheet.ciiva.com/1049/srn8040-1049453.pdf?src-supplier=Digi-Key, ComponentLink6Description=https://datasheet.ciiva.com/1049/srn8040-1049454.pdf?src-supplier=Digi-Key, ComponentLink6URL=https://datasheet.ciiva.com/1049/srn8040-1049454.pdf?src-supplier=Digi-Key, ComponentLink7Description=https://datasheet.ciiva.com/1049/srn8040-1049455.pdf?src-supplier=Digi-Key, ComponentLink7URL=https://datasheet.ciiva.com/1049/srn8040-1049455.pdf?src-supplier=Digi-Key, ComponentLink8Description=https://datasheet.ciiva.com/17284/srn8040-17284783.pdf?src-supplier=Avnet+Europe, ComponentLink8URL=https://datasheet.ciiva.com/17284/srn8040-17284783.pdf?src-supplier=Avnet+Europe, ComponentLink9Description=https://datasheet.ciiva.com/48691/001056460-da-01-en-mag-abg-leist-ind-srn8040-2r2y-2-2uh-smd-48691836.pdf?src-supplier=Conrad, ComponentLink9URL=https://datasheet.ciiva.com/48691/001056460-da-01-en-mag-abg-leist-ind-srn8040-2r2y-2-2uh-smd-48691836.pdf?src-supplier=Conrad, Composition=Wirewound, Contact Plating=Tin, Core Material=Ferrite, DC Current=6.3A, Depth=8.3mm, Height=4mm, Height - Seated (Max)=0.157inch, Length=8mm, Manufacturer Part Number 1=SRN8040-2R2Y, Material=Steel, Max DC Current=6.3A, Military Standard=Not, Mount="Surface Mount", Number of Pins=2, Packaging="Tape and Reel", Pricing 1="1=0.78000, 10=0.68400, 100=0.48880, 500=0.41056 (USD)", REACH SVHC="No SVHC", RMS Current (Irms)=6.3A, RoHS=Yes, Shielding=Shielded, Stock 1=4815, Supplier 1=Digi-Key, Termination=SMD/SMT, Tolerance=30%, Weight=0.028607oz, Width=8mm
Q1: "Trans MOSFET P-CH 35V 13A 3-Pin(2+Tab) DPAK T/R", Case/Package=TO-252, Continuous Drain Current (ID)=55A, Drain to Source Breakdown Voltage=-35V, Drain to Source Resistance=11.6mR, Drain to Source Voltage (Vdss)=35V, Gate to Source Voltage (Vgs)=25V, Input Capacitance=2.37nF, Manufacturer 1="ON Semiconductor / Fairchild", Max Operating Temperature=150°C, Max Power Dissipation=57W, Min Operating Temperature=-55°C, On-State Resistance=11.6MR, Package Quantity=1, Power Dissipation=3.1W, Supplier Part Number 1=FDD6637CT-ND, Threshold Voltage=-1.6V, ComponentLink1Description=https://datasheet.ciiva.com/34303/1958253-34303413.pdf?src-supplier=Jameco, ComponentLink1URL=https://datasheet.ciiva.com/34303/1958253-34303413.pdf?src-supplier=Jameco, ComponentLink2Description=https://datasheet.ciiva.com/15137/getdatasheetpartid-35276-15137060.pdf?src-supplier=Verical, ComponentLink2URL=https://datasheet.ciiva.com/15137/getdatasheetpartid-35276-15137060.pdf?src-supplier=Verical, ComponentLink3Description=https://datasheet.ciiva.com/4442/fdd6637-77901-4442502.pdf?src-supplier=Mouser, ComponentLink3URL=https://datasheet.ciiva.com/4442/fdd6637-77901-4442502.pdf?src-supplier=Mouser, ComponentLink4Description=https://datasheet.ciiva.com/25625/0900766b810c960f-25625341.pdf?src-supplier=RSComponents, ComponentLink4URL=https://datasheet.ciiva.com/25625/0900766b810c960f-25625341.pdf?src-supplier=RSComponents, ComponentLink5Description=https://datasheet.ciiva.com/26790/fdd6637-26790820.pdf?src-supplier=IIIC, ComponentLink5URL=https://datasheet.ciiva.com/26790/fdd6637-26790820.pdf?src-supplier=IIIC, ComponentLink6Description=https://datasheet.ciiva.com/6382/fdd6637-6382455.pdf?src-supplier=Digi-Key, ComponentLink6URL=https://datasheet.ciiva.com/6382/fdd6637-6382455.pdf?src-supplier=Digi-Key, ComponentLink7Description=https://datasheet.ciiva.com/28548/686553-28548172.pdf?src-supplier=Element14, ComponentLink7URL=https://datasheet.ciiva.com/28548/686553-28548172.pdf?src-supplier=Element14, ComponentLink8Description=https://datasheet.ciiva.com/6382/fdd6637-6382456.pdf?src-supplier=Digi-Key, ComponentLink8URL=https://datasheet.ciiva.com/6382/fdd6637-6382456.pdf?src-supplier=Digi-Key, ComponentLink9Description=https://datasheet.ciiva.com/6382/fdd6637-6382457.pdf?src-supplier=Digi-Key, ComponentLink9URL=https://datasheet.ciiva.com/6382/fdd6637-6382457.pdf?src-supplier=Digi-Key, Element Configuration=Single, Fall Time=36ns, Height=2.39mm, Lead Free="Lead Free", Length=6.73mm, Manufacturer Part Number 1=FDD6637, Mount="Surface Mount", Nominal Vgs=-1.6V, Number of Elements=1, Number of Pins=3, Packaging="Tape and Reel", Pricing 1="1=1.02000, 10=0.90700, 25=0.86120, 100=0.64600, 250=0.63980, 500=0.54752, 1000=0.44602 (USD)", Radiation Hardening=No, Rds On Max=11.6mR, REACH SVHC="No SVHC", Rise Time=10ns, RoHS=Yes, Stock 1=15110, Supplier 1=Digi-Key, Turn-Off Delay Time=62ns, Turn-On Delay Time=18ns, Weight=0.26037g, Width=6.22mm
R1: library part RES_4.7kO_0805, "RES SMD 4.7K OHM 5% 1/8W 0805", Case/Package=Molded, Case Code (Imperial)=0805, Case Code (Metric)=2012, Manufacturer 1=Yageo, Manufacturer Part Number 1=RC0805JR-074K7L, Max Operating Temperature=155°C, Min Operating Temperature=-55°C, Power Rating=125mW, Resistance=4.7kR, Supplier Part Number 1=311-4.7KARCT-ND, Temperature Coefficient=100ppm/°C, Tolerance=5%, Voltage Rating=150V, ComponentLink1Description=https://datasheet.ciiva.com/7941/442941-7941973.pdf?src-supplier=Element14, ComponentLink1URL=https://datasheet.ciiva.com/7941/442941-7941973.pdf?src-supplier=Element14, ComponentLink2Description=https://datasheet.ciiva.com/7941/442941-7941974.pdf?src-supplier=Element14, ComponentLink2URL=https://datasheet.ciiva.com/7941/442941-7941974.pdf?src-supplier=Element14, ComponentLink3Description=https://datasheet.ciiva.com/17486/rc0805-17486827.pdf?src-supplier=Future+Electronics, ComponentLink3URL=https://datasheet.ciiva.com/17486/rc0805-17486827.pdf?src-supplier=Future+Electronics, ComponentLink4Description=https://datasheet.ciiva.com/12667/rc0805-12667037.pdf?src-supplier=Mouser, ComponentLink4URL=https://datasheet.ciiva.com/12667/rc0805-12667037.pdf?src-supplier=Mouser, Composition="Thick Film", Contact Plating=Tin,Lead,Matte, Depth=1.25mm, Lead Free="Lead Free", Length=2mm, Military Standard=Not, Mount="Surface Mount", Packaging="Tape and Reel", Pricing 1="1=0.10000, 10=0.03500, 100=0.01400, 1000=0.00631, 2500=0.00548 (USD)", Radiation Hardening=No, REACH SVHC=Unknown, RoHS=Yes, Stock 1=2755291, Supplier 1=Digi-Key, Termination=SMD/SMT
R2 R7 R9: library part RES_1kO_0603, "RES SMD 1K OHM 5% 1/10W 0603", Case/Package=0603, Case Code (Metric)=1608, Manufacturer 1=Yageo, Manufacturer Part Number 1=RC0603JR-071KL, Package="0603 (1608 Metric)", Supplier Part Number 1=311-1.0KGRCT-ND, Tolerance=5%, Dimensions="0.063\" L x 0.031\" W (1.60mm x 0.80mm)", Mount="Surface Mount", Supplier 1=Digi-Key
R3 R5: library part RES_250mO_2512, "Chip Resistor, 250 mOhm, +/- 1%, 1 W, -65 to 170 degC, 2512 (6432 Metric), RoHS, Tape and Reel", Manufacturer=Vishay, Package Description="2-Pin Surface Mount Device, Body 6.35 x 3.18 mm", Package Reference=2512, Power Rating=1W, Resistance=250mO, Resistance Tolerance=1%, Resistor Case Style=2512[6432Metric], Resistor Element Type=MetalStrip, Temperature Coefficient=±75ppm/°C, Automotive Qualification Standard=AEC-Q200, Datasheet URL=http://www.vishay.com/docs/30100/wsl.pdf, Datasheet Version=07/2016, Manufacturer URL=http://www.vishay.com/, Mounting Technology=SurfaceMount, MSL=MSL1-Unlimited, Packaging=CutTape, Product Range=WSLSeries, SVHC=NoSVHC(15-Jun-2015)
R4: library part RES_1O_1206, "RES 1 OHM 5% 1/4W 1206", Case/Package=1206, Case Code (Metric)=3216, Manufacturer="KOA Speer", Manufacturer Part Number=RK73B2BTTE1R0J, Max Operating Temperature=155°C, Min Operating Temperature=-55°C, Package Quantity=4000, Power Rating=250mW, Resistance=1O, Supplier Part Number 1=2019-RK73B2BTTE1R0JCT-ND, Temperature Coefficient=200ppm/°C, Tolerance=5%, Voltage Rating=200V, Case Code (Imperial)=1206, Category="Chip SMD Resistors", ComponentLink1Description=https://datasheet.ciiva.com/5555/rk73b-5555368.pdf?src-supplier=Mouser, ComponentLink1URL=https://datasheet.ciiva.com/5555/rk73b-5555368.pdf?src-supplier=Mouser, Composition="Thick Film", Height=0.6mm, Length=3.2mm, Packaging="Tape and Reel", Pricing 1="1=0.10000, 10=0.04600, 100=0.01880, 1000=0.00845 (USD)", RoHS=Yes, Stock 1=3828, Supplier 1=Digi-Key, Termination=SMD/SMT, Width=1.6mm
R6: "RES SMD 1K OHM 5% 1/10W 0603", Manufacturer 1=Yageo, Manufacturer Part Number 1=RC0603JR-071KL, Package="0603 (1608 Metric)", Supplier Part Number 1=311-1.0KGRCT-ND, Tolerance=5%, Dimensions="0.063\" L x 0.031\" W (1.60mm x 0.80mm)", Mount="Surface Mount", Supplier 1=Digi-Key
R8: library part RES_49.9kO_0603, "RES 49.9K OHM 1% 1/10W 0603", Case/Package=0603, Case Code (Metric)=1608, Manufacturer="KOA Speer", Manufacturer Part Number 1=RK73H1JTTD4992F, Max Operating Temperature=155°C, Min Operating Temperature=-55°C, Package="0603 (1608 Metric)", Package Quantity=5000, Power Rating=100mW, Resistance=49.9kO, Supplier Part Number 1=2019-RK73H1JTTD4992FCT-ND, Temperature Coefficient=100ppm/°C, Tolerance=1%, Voltage Rating=50V, Category="Chip SMD Resistors", ComponentLink1Description=https://datasheet.ciiva.com/5555/rk73h-5555450.pdf?src-supplier=Mouser, ComponentLink1URL=https://datasheet.ciiva.com/5555/rk73h-5555450.pdf?src-supplier=Mouser, ComponentLink2Description=https://datasheet.ciiva.com/7693/549017-7693854.pdf?src-supplier=Element14, ComponentLink2URL=https://datasheet.ciiva.com/7693/549017-7693854.pdf?src-supplier=Element14, Composition="Thick Film", Depth=0.8mm, Dimensions="0.063\" L x 0.031\" W (1.60mm x 0.80mm)", Height=0.45mm, Lead Free="Lead Free", Length=1.6mm, Military Standard=Not, Mount="Surface Mount", Number of Pins=2, Packaging="Tape and Reel", Pricing 1="1=0.10000, 10=0.02200, 100=0.00910, 1000=0.00408, 2500=0.00354 (USD)", RoHS=Yes, Stock 1=339046, Supplier 1=Digi-Key, Termination=SMD/SMT, Voltage Rating (DC)=50V, Width=0.8mm
R10: library part RES_3.3kO_0603, "RES SMD 3.3K OHM 5% 1/10W 0603", Case/Package=0603, Case Code (Metric)=1608, Manufacturer 1=Yageo, Manufacturer Part Number 1=RC0603JR-073K3L, Package="0603 (1608 Metric)", Supplier Part Number 1=311-3.3KGRCT-ND, Tolerance=5%, Dimensions="0.063\" L x 0.031\" W (1.60mm x 0.80mm)", Mount="Surface Mount", Supplier 1=Digi-Key